# Altium PCB CAN_Logger_V1I1.PcbDoc
Units mm, origin at the board's own origin, x right, y up, seen from the top; angles counter-clockwise.
Board outline 65 x 39 mm, 4 copper layers (Top Layer, GND, PWR, Bottom Layer), stack 1.56 mm thick; 49 components, 33 nets, 180 pads, 62 vias.
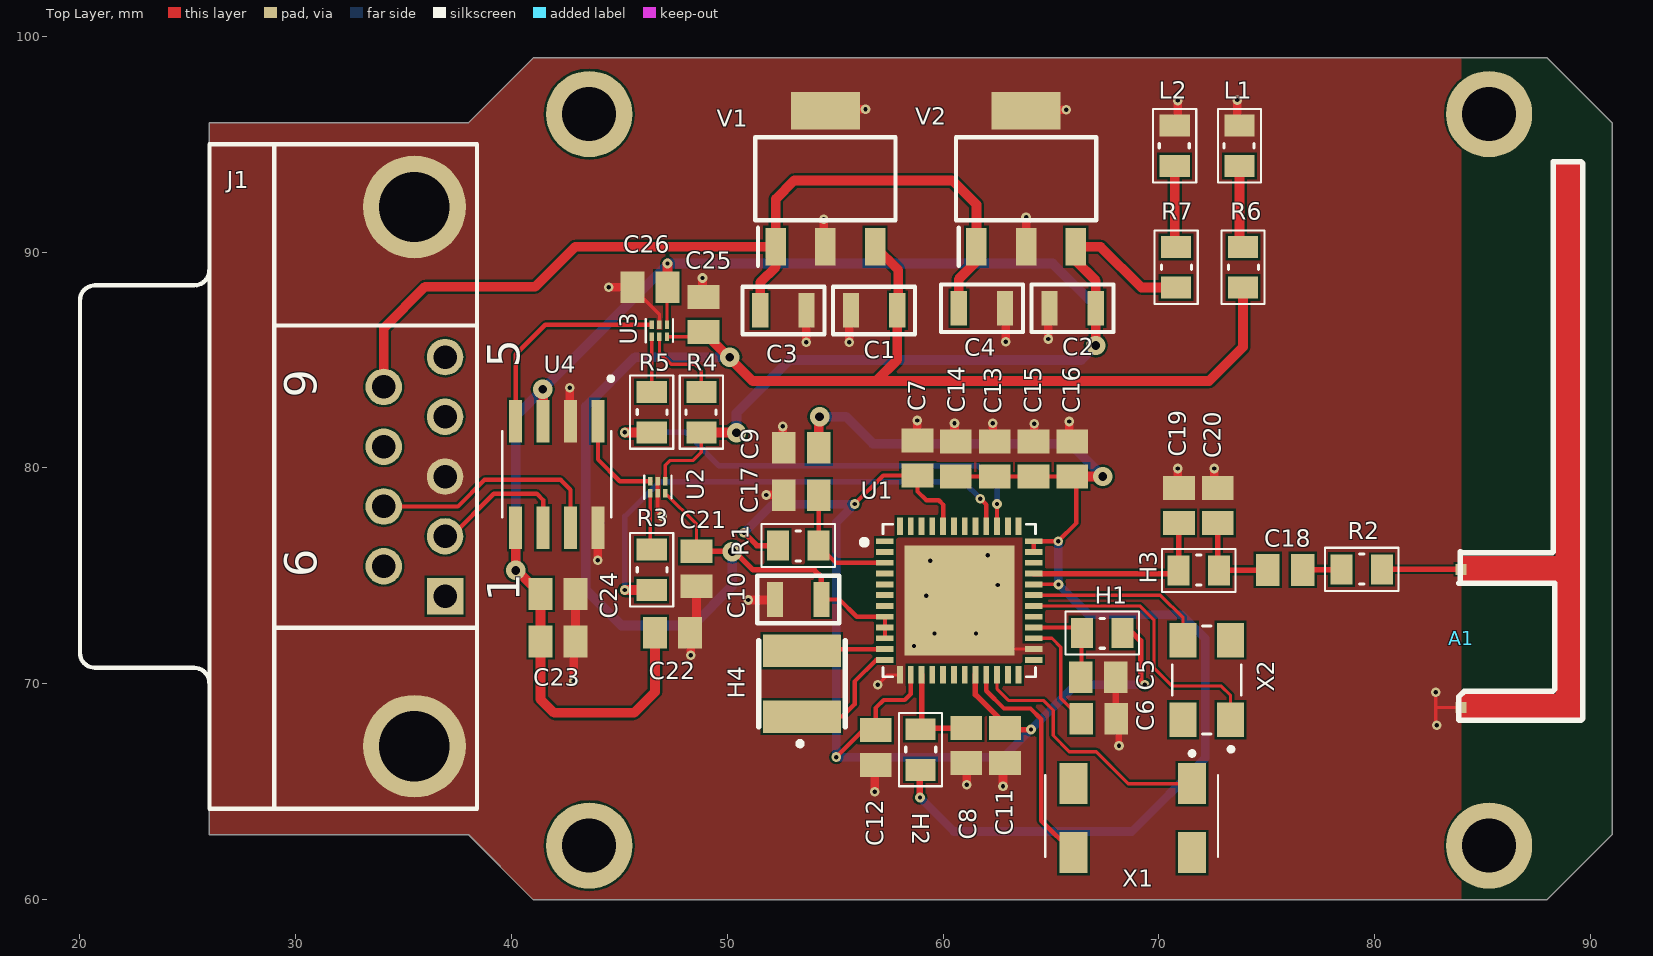
[diagram p0: Top Layer view]
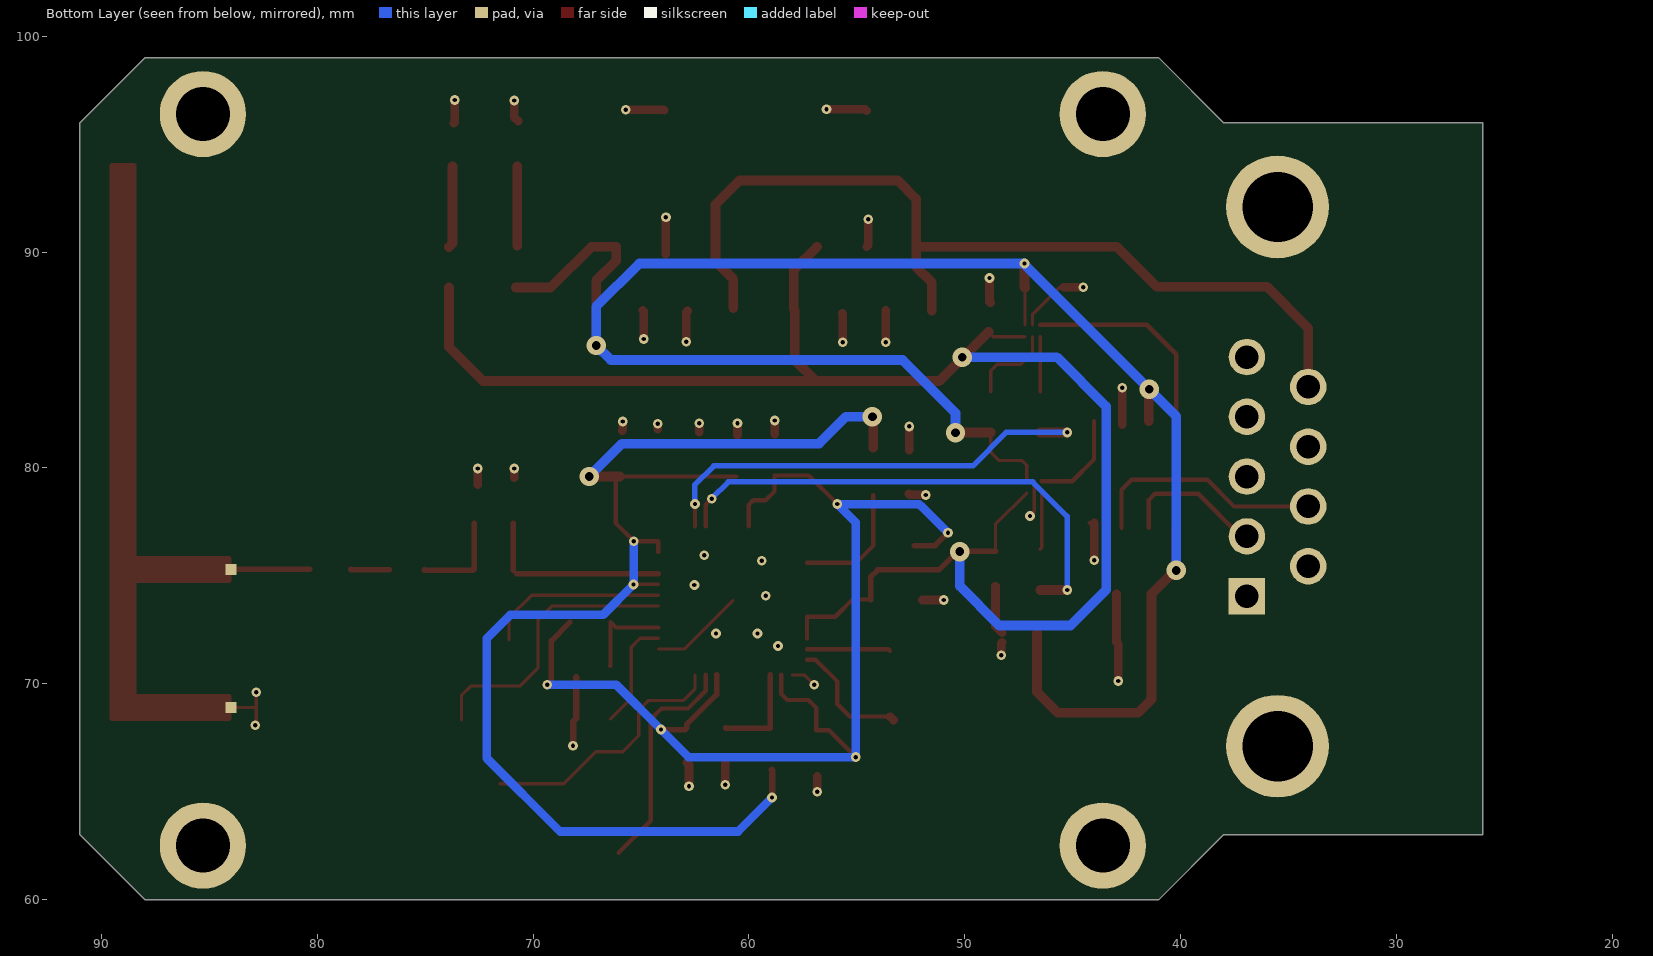
[diagram p1: Bottom Layer view, seen from below]
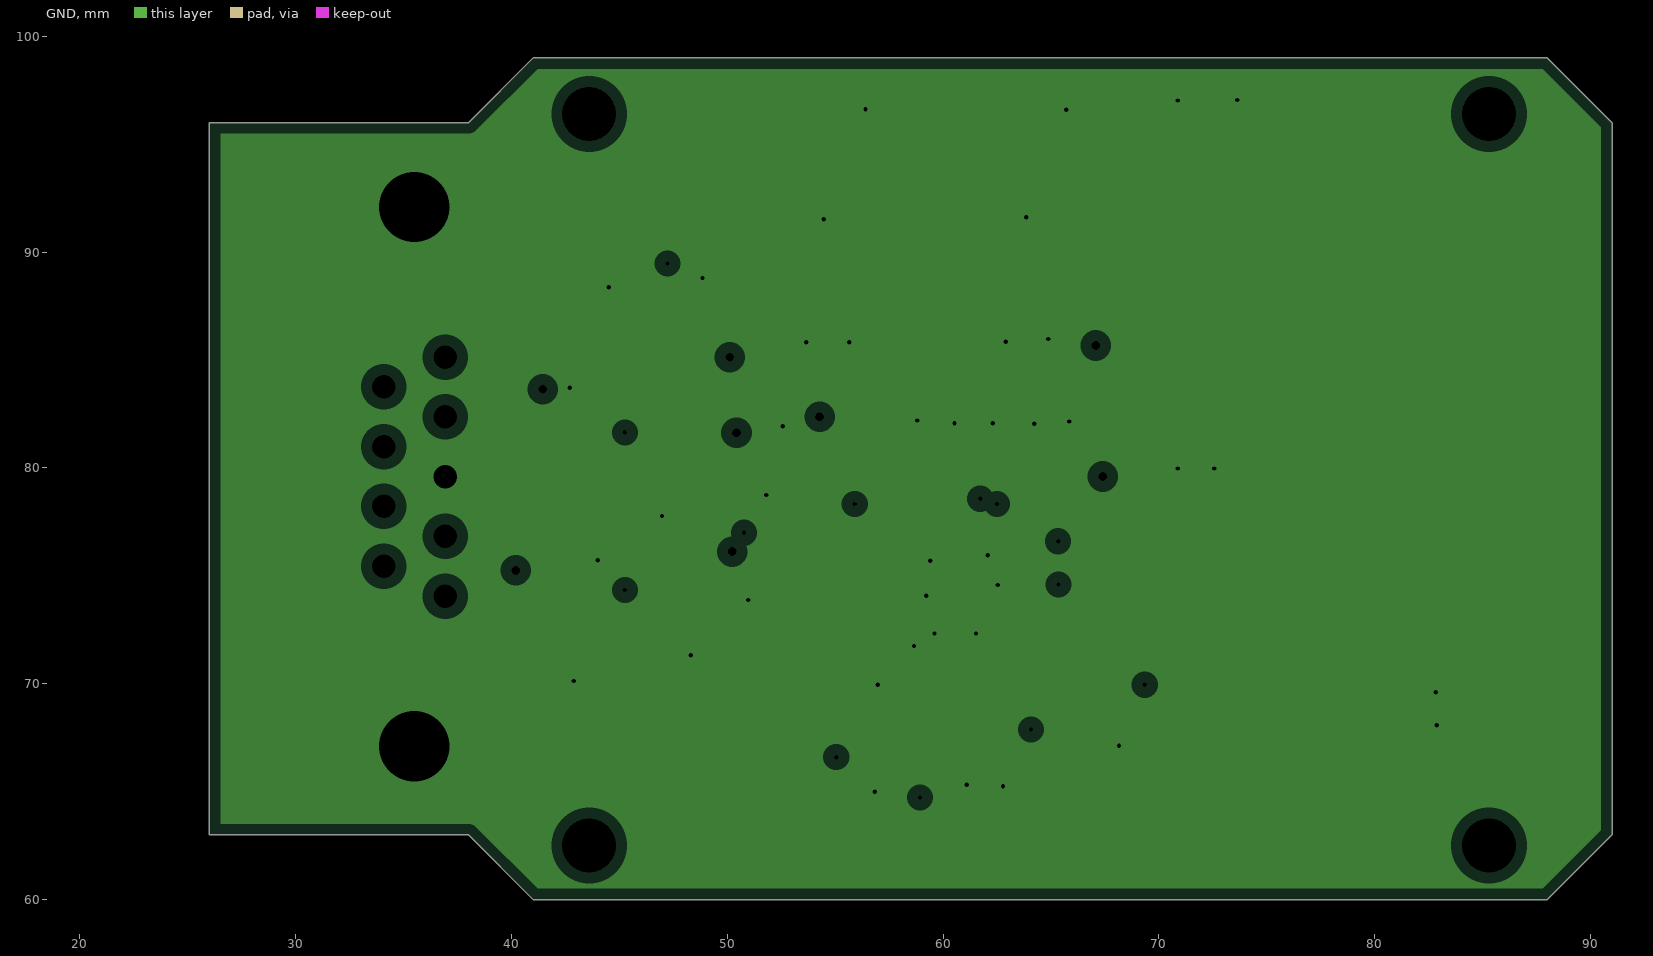
[diagram p2: GND, clearances drawn from the general rule]
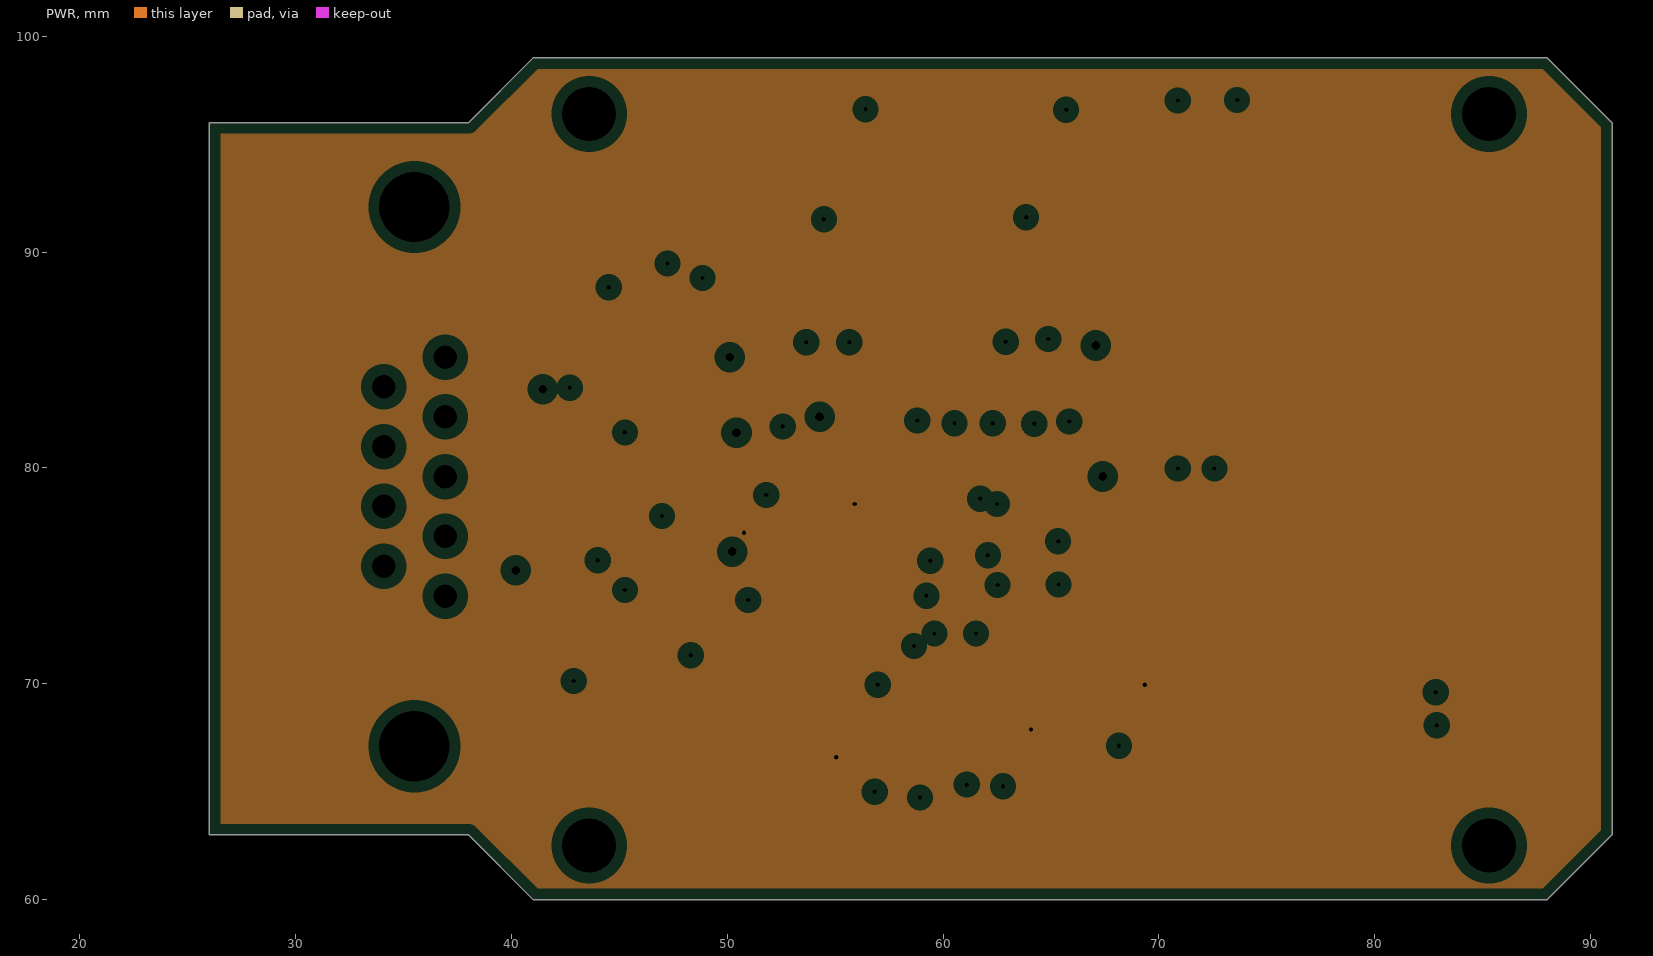
[diagram p3: PWR, clearances drawn from the general rule]

## Layer stack, top to bottom
Top Solder: solder mask 0.02, Solder Resist, Dk 3.5
Top Layer: signal copper 0.043
Dielectric 1: prepreg 0.1123, FR-4, Dk 4.2
GND: plane copper 0.035, net GND
Dielectric 2: core 1.1794, FR-4, Dk 4.2
PWR: plane copper 0.035, net VDD_BRD
Dielectric 3: prepreg 0.1123, FR-4, Dk 4.2
Bottom Layer: signal copper 0.043
Bottom Solder: solder mask 0.02, Solder Resist, Dk 3.5

## Board outline
26,63 26,96 38,96 41,99 88,99 91,96 91,63 88,60 41,60 38,63

## Design rules (kind name [scope] priority, off if disabled: settings)
Clearance [All] p1: gap=0.1
HoleSize [All] p1: absolutevalues=TRUE maxlimit=5 minlimit=0.025 maxpercent=80.000 minpercent=20.000
HoleToHoleClearance [All] p1: gap=0.1 allowstackedmicrovias=TRUE
MinimumSolderMaskSliver [All] p1: minsoldermaskwidth=0.1
PlaneClearance [All] p1: clearance=0.508
PlaneConnect [All] p1: planeconnectstyle=Direct reliefexpansion=0.508 reliefentries=4 reliefconductorwidth=0.254 reliefairgap=0.254
PolygonConnect [All] p1: connectstyle=Direct reliefconductorwidth=0.254 reliefentries=4 polygonreliefangle="90 Angle" airgapwidth=0.254
RoutingVias [All] p1: holewidth=0.2 width=0.45 viastyle="Through Hole" minholewidth=0.2 minwidth=0.45 maxholewidth=0.8 maxwidth=1.6
SilkToSilkClearance [All] p1: silktosilkclearance=0.1
SilkToSolderMaskClearance [IsPad] p1: minsilkscreentomaskgap=0.1 clearancetoexposedcopper=TRUE
SolderMaskExpansion [All] p1: expansion=0.102
Width [All] p1: maxlimit=2 minlimit=0.1 preferedwidth=0.2
23 further rules are at their usual default settings.

## Classes and differential pairs
component class "[03] - Controller": A1 C1 C2 C3 C4 C5 C6 C7 C8 C9 C10 C11 C12 C13 C14 C15 C16 C17 C18 C19 C20 H1 H2 H3 H4 L1 L2 R1 R2 R6 R7 U1 V1 V2 X1 X2
component class "[04] - CAN": C21 C22 C23 C24 C25 C26 J1 R3 R4 R5 U2 U3 U4

## Components (designator, comment, footprint, x,y, rotation, side; value= is the part's Value field where it differs from the comment)
A1 "Antenna" Antenna 90,89.5 r0 top locked
C1 "10uF" C1206 56.8,87.3 r180 top
C2 "10uF" C1206 66,87.4 r180 top
C3 "10uF" C1206 52.6,87.3 r180 top
C4 "10uF" C1206 61.8,87.4 r180 top
C5 "1uF" C0805 67.15,70.375 r0 top
C6 "0.1uF" C0805 67.25,68.3 r180 top
C7 "10uF" C0805 58.887,80.503 r270 top
C8 "10uF" C0805 61,67.1 r90 top
C9 "1uF" C0805 53.387,81.003 r0 top
C10 "10uF" C1206 53.287,73.903 r0 top
C11 "0.1uF" C0805 62.8,67.1 r90 top
C12 "0.1uF" C0805 56.8,67 r90 top
C13 "1uF" C0805 62.46,80.454 r270 top
C14 "0.1uF" C0805 60.66,80.454 r270 top
C15 "20pF" C0805 64.26,80.454 r270 top
C16 "20pF" C0805 66.06,80.454 r270 top
C17 "0.1uF" C0805 53.387,78.803 r0 top
C18 "10pF" C0805 75.9,75.2 r180 top
C19 "0.8pF" C0805 71,78.3 r270 top
C20 "0.8pF" C0805 72.8,78.3 r270 top
C21 "0.1uF" C0805 48.497,75.287 r90 top
C22 "0.1uF" C0805 47.497,72.287 r180 top
C23 "0.1uF" C0805 42.197,71.887 r180 top
C24 "0.1uF" C0805 42.197,74.087 r180 top
C25 "0.1uF" C0805 48.973,87.151 r270 top
C26 "0.1uF" C0805 46.373,88.451 r0 top
H1 "0.1uH" I-0805 67.325,72.3 r180 top
H2 "0.1uH" I-0805 59,66.9 r270 top
H3 "4.7nH" I-0805 71.9,75.3 r0 top
H4 "10uH" SRN4018 53.587,70.003 r90 top
J1 "D Connector 9" DSUB1.385-2H9 26,79.6 r90 top locked
L1 "599-0130-007F" LED0805 73.7,94.9 r90 top
L2 "599-0130-007F" LED0805 70.7,94.9 r90 top
R1 "10K" R0805 53.287,76.403 r180 top
R2 "0" R0805 79.4,75.3 r0 top locked
R3 "0" R0805 46.497,75.287 r270 top
R4 "4.7" R0805 48.797,82.587 r90 top
R5 "0" R0805 46.497,82.587 r270 top
R6 "220" R0805 73.9,89.3 r270 top
R7 "220" R0805 70.8,89.3 r270 top
U1 "MKW35Z512VHT4" MKW35Z512VHT4 56.587,69.703 r0 top
U2 "74LVCH1T45GS" 74LVCH1T45GS,132 46,79.9 r270 top
U3 "74LVCH1T45GS" 74LVCH1T45GS,132 46.073,87.151 r270 top locked
U4 "TJA1057GT/3J" TJA1057GT/3J 39.297,83.487 r270 top locked
V1 "3.3V 500mA" UA78M05/33-CDCYR 54.8,93.4 r90 top
V2 "5V 500mA" UA78M05/33-CDCYR 64.1,93.4 r90 top
X1 "MC-306 32.768KHz" MC-306_32.768KHz 72.8,65.8 r180 top
X2 "32MHz" ECS-250-18-30B-JTN-TR 74.05,67.325 r90 top

## Footprints (in the part's own frame and the unit in brackets; to place one, negate y for a bottom-side part, rotate by r counter-clockwise, add the part's x,y. Pads: shape width x height; smd on the part's side, far side on the other; paste and mask are expansions set on the pad)
74LVCH1T45GS,132 [mm] "74LVCH1T45GS,132"
  rect 0.4x0.2 smd: 1(0.516,1.129) 2(0.516,0.779) 3(0.516,0.429) 4(1.066,0.429) 5(1.066,0.779) 6(1.066,1.129)
  silkscreen extent 0.26,0.15 1.32,1.41, body extent 0.27,0.27 1.33,1.3, height 0.39
Antenna [mm]
  rect 0.5x0.5 all layers, no hole: 1(-6,-20.6) 2(-6,-14.2)
  Top Layer region: -5.9,-21.1 -0.8,-21.1 -0.8,-20.1 -5.9,-20.1
  Top Layer region: -5.9,-14.7 -0.8,-14.7 -0.8,-13.7 -5.9,-13.7
  Top Layer region: -1.5,-21.1 -0.5,-21.1 -0.5,4.5 -1.5,4.5
  Top Layer lines w0.254: -1.5,-13.7 -5.9,-13.7 -5.9,-14.2 -5.9,-14.7 -0.5,-14.7 ; -1.5,-13.7 -1.5,-20.1 -5.9,-20.1 -5.9,-21.1 -0.5,-21.1 -0.5,-14.7 ; -1.5,-13.7 -1.5,4.5 -0.5,4.5 -0.5,-13.7 -0.5,-14.7
C0805 [mm]
  rect 1.1x1.47 smd: 1(-0.769,-0.073) 2(0.851,-0.073)
  body extent -1.02,-0.67 1.12,0.53, height 0.5
C1206 [mm]
  rect 0.75x1.6 smd: 1(-1.075,0) 2(1.075,0)
  silkscreen extent -1.9,-1.1 1.9,1.1, body extent -1.02,-0.75 0.98,0.72, height 0.6
DSUB1.385-2H9 [mm]
  rect 1.69x1.69 hole 1.09: 1(-5.54,-10.92)
  round 1.69 hole 1.09: 2(-2.77,-10.92) 3(0,-10.92) 4(2.77,-10.92) 5(5.54,-10.92) 6(-4.155,-8.08) 7(-1.385,-8.08) 8(1.385,-8.08) 9(4.155,-8.08)
  round 4.76 hole 3.26: 10(-12.495,-9.5) 11(12.495,-9.5)
  silkscreen extent -15.4,-12.4 15.4,6, body extent -15.7,-12.69 15.61,6.11, height 12.55
ECS-250-18-30B-JTN-TR [mm] "Crystal 25mhz 18pf Smd"
  rect 1.6x1.25 smd: 1(0.999,0.73) 2(4.699,0.73) 3(4.699,2.93) 4(0.999,2.93)
  silkscreen extent -0.46,0.23 5.35,3.43, body extent 0.35,0.25 5.35,3.45, height 0.85
I-0805 [mil]
  rect 40x55 smd: 1(-38.97,-1.97) 2(35.03,-1.97)
  silkscreen extent -69,-41 65,37, body extent -48,-26 44,22, height 20
LED0805 [mil]
  rect 40x55 smd: 1(-35.94,-1.3) 2(38.06,-1.3)
  silkscreen extent -66,-41 68,38, body extent -38,-26 41,24, height 39
MC-306_32.768KHz [mm] "Crystals 32.768KHz 12.5pF 20ppm -40C +85C"
  rect 1.3x1.9 smd: 1(1.264,0.432) 2(6.764,0.432) 3(6.764,3.632) 4(1.264,3.632)
  silkscreen extent 0.06,-1.07 8.06,3.83, body extent 1.45,0.43 6.45,3.63, height 0.85
MKW35Z512VHT4 [mm] "RF System on a Chip - SoC Kinetis W 32-bit MCU, ARM Cortex-M0+, 512KB Flash, 64KB SRAM, 48MHz, BLE, 48LQFN"
  rect 0.81x0.27 smd: 1(0.718,6.902) 2(0.718,6.402) 3(0.718,5.902) 4(0.718,5.402) 5(0.718,4.902) 6(0.718,4.402) 7(0.718,3.902) 8(0.718,3.402) 9(0.718,2.902) 10(0.718,2.402) 11(0.718,1.902) 12(0.718,1.402) 25(7.608,1.402) 26(7.608,1.902) 27(7.608,2.402) 28(7.608,2.902) 29(7.608,3.402) 30(7.608,3.902) 31(7.608,4.402) 32(7.608,4.902) 33(7.608,5.402) 34(7.608,5.902) 35(7.608,6.402) 36(7.608,6.902)
  rect 0.27x0.81 smd: 13(1.413,0.707) 14(1.913,0.707) 15(2.413,0.707) 16(2.913,0.707) 17(3.413,0.707) 18(3.913,0.707) 19(4.413,0.707) 20(4.913,0.707) 21(5.413,0.707) 22(5.913,0.707) 23(6.413,0.707) 24(6.913,0.707) 37(6.913,7.597) 38(6.413,7.597) 39(5.913,7.597) 40(5.413,7.597) 41(4.913,7.597) 42(4.413,7.597) 43(3.913,7.597) 44(3.413,7.597) 45(2.913,7.597) 46(2.413,7.597) 47(1.913,7.597) 48(1.413,7.597)
  rect 5.1x5.1 smd: 49(4.163,4.152)
  silkscreen extent -0.29,0.62 7.69,7.68, body extent 0.64,0.63 7.69,7.68, height 0.9
R0805 [mil]
  rect 40x55 smd: 1(-37,0) 2(37,0)
  silkscreen extent -67,-39 67,39, body extent -46,-24 46,24, height 20
SRN4018 [mm] "Fixed Inductors 6.8uH 20% SMD 4018"
  rect 1.5x3.6 smd: 1(-1.525,0.127) 2(1.525,0.127)
  silkscreen extent -2.87,-1.87 2,2.13, body extent -1.6,-1.4 1.7,1.5, height 1.8
TJA1057GT/3J [mm] "CAN Interface IC High-speed CAN transceive"
  rect 1.97x0.6 smd: 1(1.317,4.707) 2(1.317,3.437) 3(1.317,2.167) 4(1.317,0.897) 5(6.257,0.897) 6(6.257,2.167) 7(6.257,3.437) 8(6.257,4.707)
  silkscreen extent -0.75,0.28 5.78,5.41, body extent -0.35,0.05 8.05,5.43, height 2.2
UA78M05/33-CDCYR [mm] "Linear Voltage Regulators 5.0V/3.3V 500mA Fxd Pos"
  rect 1.75x0.95 smd: 1(-3.15,2.554) 2(-3.15,0.254) 3(-3.15,-2.046)
  rect 1.75x3.2 smd: 4(3.15,0.254)
  silkscreen extent -4.03,-3 1.92,3.5, body extent -3.5,-2.94 3.5,3.56, height 1.58

## Part data
C1 C2: library part EIA_A-4.7uF,10V, "Tantalum Capacitors - Polymer SMD 10V 4.7uF 20% 1206 ESR=300mOhm"
C3 C4 C10: library part C_1206-10uF, "Multilayer Ceramic Capacitors MLCC - SMD/SMT 10uF Y5V -20/+80% 50V"
C5 C9 C13: library part C_0805-1uF, "Multilayer Ceramic Capacitors MLCC - SMD/SMT 10V 1uF X7R 0805 10%"
C6 C11 C12 C14 C17 C21 C22 C23 C24 C25 C26: library part C_0805-0.1uF, "Multilayer Ceramic Capacitors MLCC - SMD/SMT 0.1uF 10% 50V AEC-Q200"
C7 C8 C18: library part C_0805-10uF, "Multilayer Ceramic Capacitors MLCC - SMD/SMT 10uF 10% 25V"
C15 C16 C19 C20: library part C_0805-20pF, "Multilayer Ceramic Capacitors MLCC - SMD/SMT 20pF 100volts C0G 5%"
H1 H2: library part I_0805-0.1uH, "Fixed Inductors .1uH 5%"
H3: library part I_0805-4.7nH, "Fixed Inductors 4.7nH"
H4: library part SRN4018-100M, "Fixed Inductors 10uH 20% SMD 4018"
J1: "Receptacle Assembly, 9 Position, Right Angle"
L1 L2: "Standard LEDs - SMD SMD 0805 ORANGE"
R1: library part R_0805-10K, "Thick Film Resistors - SMD 10K   OHM   1% 1/4W"
R2 R3 R5: library part R_0805-0, "Current Sense Resistors - SMD 0 ohm Jumper 1/2W"
R4: library part R_0805-4.7, "Thin Film Resistors - SMD 4.7 ohm 1% 50 ppm High-Precision"
R6 R7: library part R_0805-220, "Thin Film Resistors - SMD"
U1: "RF System on a Chip - SoC Kinetis W 32-bit MCU, ARM Cortex-M0+, 512KB Flash, 64KB SRAM, 48MHz, BLE, 48LQFN"
U2 U3: library part 74LVCH1T45GS,132, "Bus Transceivers 3.6V 250mW 8.2ns"
U4: "CAN Interface IC High-speed CAN transceiver"
V1: library part UA78M33CDCYR, "Linear Voltage Regulators 3.3V 500mA Fixd Pos"
V2: library part UA78M05CDCYR, "Linear Voltage Regulators 5.0V 500mA Fxd Pos"
X1: "Crystals 32.768KHz 12.5pF 20ppm -40C +85C"
X2: library part ECS-25MHz, "Crystals 25MHz 20ppm 18pF -40C +85C"

## Free pads (board coordinates)
  round 4 hole 2.5: 0(43.6,62.5) 0(43.6,96.4) 0(85.3,62.5) 0(85.3,96.4)

## Via types
v1: diameter 0.45, hole 0.2, Top Layer to Bottom Layer, 54 vias
v2: diameter 0.9, hole 0.4, Top Layer to Bottom Layer, 8 vias

## Nets (pads, with @x,y where several pads share a name; then routed paths per layer and width w, separated by ;. In a path a pad name is that pad's centre, name@x,y a point inside that pad or via, vN(x,y) a via of type N, cw(c..) or ccw(c..) an arc to the next point about the centre after c; other vN are vias at no path point)
+3V3_LDO: C1.1 C10.2 C21.2 C25.2 R6.2 U1.8 U1.9 U1.10 U2.6 U3.6 V1.3 | length 79.1
  Top Layer w0.15: U2.6 48.575,77.388 48.575,76.143 C21.2 ; U3.6 48.685,86.085 C25.2
  Top Layer w0.2: C10.2 55.197,73.903 55.995,73.105 U1.8 U1.9 U1.10
  Top Layer w0.254: C21.2 50.337,76.138 51.2,75.275 54.025,75.275 54.362,74.938 C10.2
  Top Layer w0.45: C25.2 51.175,84.025 56.9,84.025 ; V1.3 57.925,89.171 57.925,87.35 C1.1 57.875,85 56.9,84.025 ; R6.2 73.9,85.6 72.325,84.025 56.9,84.025
  Bottom Layer w0.45: v2(50.12,85.132) 45.732,85.132 43.446,82.846 43.446,74.354 45.1,72.7 48.4,72.7 50.225,74.525 v2(50.225,76.125)
+5V_LDO: C2.1 C22.2 C23.2 C24.2 C26.2 R4.1 R7.2 U2.1 U3.1 U4.3 U4.5 V2.3 | length 95.5
  Top Layer w0.15: U2.1 47.129,80.129 47.35,80.35 48.425,80.35 48.797,80.722 R4.1 ; U3.1 C26.2@47.202,88.356 ; v2@50.078,81.647 50.403,81.647 v2(50.425,81.625)
  Top Layer w0.45: U4.5 40.194,75.312 C24.2 C23.2 41.346,69.279 41.975,68.65 45.675,68.65 46.646,69.621 C22.2 ; v2(41.45,83.65) 41.464,83.636 U4.3 ; C26.2@47.202,88.356 C26.2 47.225,88.379 v1(47.225,89.475) ; R4.1 v2@50.078,81.647 ; v2(67.075,85.675) C2.1 67.075,88.675 66.146,89.604 V2.3 67.3,90.25 69.19,88.36 R7.2
  Bottom Layer w0.45: v2(40.2,75.25) 40.2,82.4 v2(41.45,83.65) v1@47.225,89.425 ; v1(47.225,89.475) 65.075,89.475 67.075,87.475 v2(67.075,85.675) 66.4,85 52.875,85 50.425,82.55 v2(50.425,81.625)
+12V_VIN: C3.2 C4.2 J1.9 V1.1 V2.1 | length 43.2
  Top Layer w0.45: J1.9 34.08,86.48 36,88.4 41.1,88.4 42.95,90.25 V1.1 ; C3.2 51.525,88.6 52.246,89.321 V1.1 ; C4.2 60.725,88.75 61.546,89.571 V2.1 61.546,92.204 60.425,93.325 53.1,93.325 52.246,92.471 V1.1
CAN_H: J1.7 U4.7 | length 11.1
  Top Layer w0.2: J1.7 37.515,78.215 38.75,79.45 42.275,79.45 42.734,78.991 U4.7
CAN_L: J1.2 U4.6 | length 6.8
  Top Layer w0.2: J1.2 37.205,76.83 39.175,78.8 41.175,78.8 41.464,78.511 U4.6
GND: A1.1 C1.2 C2.2 C3.1 C4.1 C5.2 C6.1 C7.1 C8.1 C9.1 C10.1 C11.1 C12.1 C13.1 C14.1 C15.1 C16.1 C17.1 C19.1 C20.1 C21.1 C22.1 C23.1 C24.1 C25.1 C26.1 J1.3 J1.10 J1.11 L1.2 L2.2 U1.13 U1.26 U1.49 U2.2 U2.5 U3.2 U4.2 U4.8 V1.2 V1.4 V2.2 V2.4 | length 51.8
  Top Layer w0.15: U4.8 U4.8@44.229,77.455 ; C26.1 46.852,87.13 U3.2 ; U2.2 U2.5 46.779,77.971 v1(46.975,77.775) ; v1(56.975,69.95) 57.435,70.41 U1.13 ; U1.49 63,71.605 U1.26 ; v1(82.825,69.6) 82.825,68.9 ; v1(82.875,68.075) 82.825,68.125 82.825,68.9 ; A1.1@83.798,68.9 82.825,68.9
  Top Layer w0.3: C5.2 68.001,68.391 C6.1 68.15,68.242 v1(68.15,67.125)
  Top Layer w0.4: U4.2@42.696,82 v1(42.696,83.721) ; v1(42.879,70.129) 42.879,71.85 42.966,71.937 C23.1 C24.1 ; v1(43.996,75.725) U4.8@43.996,77.446 ; v1(44.5,88.371) C26.1@45.4,88.371 ; C22.1@48.254,71.925 48.3,71.879 v1(48.3,71.325) ; C22.1 48.57,72.664 C21.1 ; C25.1@48.804,87.654 48.85,87.7 v1(48.85,88.8) ; v1(50.975,73.879) C10.1@51.971,73.879 ; v1(51.8,78.75) 52.554,78.75 C17.1@52.6,78.796 ; C9.1@52.571,80.825 v1(52.571,81.925) ; v1(53.654,85.825) C3.1@53.654,87.3 ; v1(54.475,91.525) 54.475,90.321 V1.2 ; V1.4 54.621,96.625 v1(56.4,96.625) ; v1(55.65,85.825) 55.65,87.146 C1.2@55.679,87.175 ; v1(56.829,65) C12.1@56.829,65.7 ; C7.1@58.796,81.575 58.8,81.579 v1(58.8,82.2) ; C14.1@60.521,81.525 60.525,81.529 v1(60.525,82.075) ; C8.1 61.1,66.304 v1(61.1,65.325) ; C13.1@62.296,81.65 v1(62.296,82.075) ; v1(62.775,65.25) 62.775,66.233 C11.1 ; C4.1@62.846,87.271 62.9,87.217 v1(62.9,85.85) ; V2.2@63.846,89.9 v1(63.846,91.621) ; V2.4@63.921,96.575 63.946,96.6 v1(65.7,96.6) ; 64.221,81.8 64.225,81.804 v1(64.225,82.05) ; v1(64.875,85.975) 64.875,87.25 C2.2@64.921,87.296 ; v1(65.85,82.15) 65.85,81.746 C16.1@65.871,81.725 ; L2.2@70.696,96.075 70.875,96.254 v1(70.875,97.025) ; C19.1@70.871,79.55 70.875,79.554 v1(70.875,79.975) ; C20.1@72.571,79.225 v1(72.571,79.975) ; v1(73.625,97.05) 73.625,96.021 L1.2@73.671,95.975
  other v1: 58.65,71.75 59.6,72.325 61.525,72.325 59.225,74.075 62.525,74.575 59.4,75.7 62.075,75.95
NetA1_2: A1.2 R2.2 | length 3.8
  Top Layer w0.254: R2.2 A1.2@84.1,75.3
NetC5_1: C5.1 H1.2 U1.28 | length 4.3
  Top Layer w0.2: U1.28 66.165,72.605 66.41,72.85 66.41,70.838 C5.1@66.418,70.83
NetC8_2: C8.2 H2.1 U1.15 | length 4.5
  Top Layer w0.254: U1.15 59,67.94 61.062,67.94 C8.2
NetC18_1: C18.1 R2.1 | length 1.8
  Top Layer w0.254: C18.1 78.433,75.273 R2.1
NetC18_2: C18.2 C20.2 H3.2 | length 4.5
  Top Layer w0.254: C20.2 72.727,75.313 H3.2 75.026,75.25 C18.2
NetC19_2: C19.2 H3.1 U1.33 | length 8.8
  Top Layer w0.254: U1.33 H3.1@70.765,75.105 ; H3.1 70.927,75.267 C19.2
NetH4_1: H4.1 U1.12 | length 5.8
  Top Layer w0.2: H4.1 55.328,68.478 55.9,69.05 55.9,70.1 56.905,71.105 U1.12
  Top Layer w0.4: H4.1@53.3,68.318 H4.1
NetH4_2: H4.2 U1.11 | length 3.9
  Top Layer w0.2: H4.2 53.537,71.605 U1.11
NetL1_1: L1.1 R6.1 | length 3.8
  Top Layer w0.45: L1.1 73.733,90.407 R6.1
NetL2_1: L2.1 R7.1 | length 3.8
  Top Layer w0.2: R7.1@70.733,90.307 R7.1
  Top Layer w0.45: R7.1@70.733,90.307 L2.1
NetR3_1: R3.1 U2.4 | length 2.6
  Top Layer w0.15: U2.4 46.429,76.295 R3.1
NetR4_2: R4.2 U3.5 | length 4
  Top Layer w0.15: U3.5 46.852,85.348 47.4,84.8 48.5,84.8 48.797,84.503 R4.2
NetR5_1: R5.1 U3.4 | length 2.6
  Top Layer w0.15: R5.1 46.502,83.532 U3.4
NetU1_21: U1.21 X1.3 | length 10.6
  Top Layer w0.2: U1.21 62,69.675 62.825,68.85 64.05,68.85 64.55,68.35 64.55,63.654 X1.3
NetU1_22: U1.22 X1.1 | length 12.2
  Top Layer w0.15: U1.22 62.5,69.75 63.025,69.225 64.65,69.225 65.1,68.775 65.1,67.6 65.85,66.85 67.1,66.85 68.582,65.368 X1.1
NetU1_30: U1.30 X2.1 | length 13.3
  Top Layer w0.15: U1.30 69.12,73.605 69.775,72.95 69.775,70.725 70.6,69.9 72.875,69.9 73.32,69.455 X2.1
NetU1_31: U1.31 X2.3 | length 8.4
  Top Layer w0.15: U1.31 70.07,74.105 71.12,73.055 X2.3
NetU2_3: U2.3 U4.1 | length 4.6
  Top Layer w0.2: U4.1 44.004,80.396 45.016,79.384 U2.3
NetU3_3: U3.3 U4.4 | length 10
  Top Layer w0.2: U4.4 40.194,85.269 41.56,86.635 U3.3
PTA0/SWD_DIO: U1.1
PTA1/SWD_CLK: U1.2
PTC3: R5.2 U1.39 | length 21.4
  Top Layer w0.2: U1.39 v1(62.5,78.325)
  Top Layer w0.45: v1(45.253,81.647) R5.2
  Bottom Layer w0.254: v1(45.253,81.647) 48.078,81.647 49.625,80.1 61.625,80.1 62.5,79.225 v1(62.5,78.325)
PTC4: R3.2 U1.40 | length 23.5
  Top Layer w0.2: v1(61.725,78.575) 62,78.3 U1.40
  Top Layer w0.45: v1(45.253,74.347) R3.2
  Bottom Layer w0.254: v1(45.253,74.347) 45.253,77.753 46.85,79.35 60.95,79.35 v1(61.725,78.575)
RST_TGTMCU_B: C17.2 R1.1 U1.3 | length 5.7
  Top Layer w0.2: C17.2 54.238,76.414 R1.1 55.03,75.6 57.3,75.6 U1.3
VDD_BRD: C7.2 C11.2 C12.2 H1.1 R1.2 U1.14 U1.20 U1.44 | length 55.6
  Top Layer w0.2: v1(55.05,66.6) 56.301,67.851 C12.2 56.873,68.873 57.25,69.25 58.225,69.25 58.5,69.525 U1.14 ; v1(55.9,78.325) 57.227,79.652 C7.2 58.814,78.911 59.225,78.5 59.8,78.5 60,78.3 U1.44
  Top Layer w0.254: v1(50.775,77) 51.372,76.403 R1.2 ; U1.20 61.5,69.5 62.873,68.127 C11.2 62.949,67.875 v1(64.075,67.875) ; H1.1@68.29,72.85 69.15,71.99 69.15,70.15 v1(69.35,69.95)
  Bottom Layer w0.4: v1(50.775,77) 52,78.225 52.017,78.225 52.117,78.325 v1(55.9,78.325) 55.05,77.475 v1(55.05,66.6) 62.8,66.6 v1(64.075,67.875) 66.15,69.95 v1(69.35,69.95)
VDD_REF: C9.2 C13.2 C14.2 C15.2 C16.2 H2.2 U1.32 U1.35 U1.36 | length 60.7
  Top Layer w0.15: U1.32 65.345,74.605 v1(65.35,74.6)
  Top Layer w0.2: C14.2 C13.2 C15.2 C16.2 66.175,79.415 66.175,77.45 v1(65.33,76.605) U1.36 U1.35
  Top Layer w0.3: v1(58.925,64.725) 58.925,65.985 H2.2
  Top Layer w0.45: C9.2 54.238,82.288 v2@54.25,82.3 ; C16.2 v2(67.403,79.603)
  Bottom Layer w0.4: v1(58.925,64.725) 60.5,63.15 68.75,63.15 72.15,66.55 72.15,72.1 71.05,73.2 66.75,73.2 v1(65.35,74.6) 65.33,74.62 v1(65.33,76.605)
  Bottom Layer w0.45: v2(54.275,82.375) 55.5,82.375 56.75,81.125 65.881,81.125 v2(67.403,79.603)
VREF_OUT: C6.2 U1.27 | length 5.1
  Top Layer w0.15: U1.27 65.045,72.105 65.45,71.7 65.45,69.322 C6.2
pads on no net: J1.1 J1.4 J1.5 J1.6 J1.8 U1.4 U1.5 U1.6 U1.7 U1.16 U1.17 U1.18 U1.19 U1.23 U1.24 U1.25 U1.29 U1.34 U1.37 U1.38 U1.41 U1.42 U1.43 U1.45 U1.46 U1.47 U1.48 X1.2 X1.4 X2.2 X2.4

## Polygon pours and split planes (outlines as drawn)
GND on Top Layer "Top Overlay-No Net" (solid, remove dead copper, pour order 2): 26,96 38,96 41,99 84,99 84,96 84,60 41,60 38,63 26,63
GND on GND (split plane): 90.49,95.789 90.49,63.211 87.789,60.51 41.211,60.51 38.361,63.361 38.284,63.424 38.195,63.472 38.1,63.501 38,63.51 26.51,63.51 26.51,95.49 38,95.49 38.1,95.499 38.195,95.528 38.284,95.576 38.361,95.639 41.211,98.49 87.789,98.49
VDD_BRD on PWR (split plane): 90.49,95.789 90.49,63.211 87.789,60.51 41.211,60.51 38.361,63.361 38.284,63.424 38.195,63.472 38.1,63.501 38,63.51 26.51,63.51 26.51,95.49 38,95.49 38.1,95.499 38.195,95.528 38.284,95.576 38.361,95.639 41.211,98.49 87.789,98.49

## Silkscreen, mask and mechanical layers (free items; w line width, h text height)
Top Overlay:
  lines w0.254: 83.9,68.325 83.9,69.4 84.15,69.65 88.25,69.65 88.35,69.75 88.35,74.65 83.9,74.65 83.975,74.725 83.975,76.125 84.025,76.075 88.225,76.075 88.275,76.125 88.275,94.2 89.55,94.2 89.65,94.1 89.65,68.4 89.55,68.3 83.925,68.3 83.9,68.325
Top Solder:
  rectangle: 84,59.975 91.075,99.05
Dimention:
  lines w0.254: 19.492,64.524 20,63 ; 19.492,94.476 20,96 ; 19.746,63 20.254,63 ; 19.746,96 20.254,96 ; 20,74.396 20,63 ; 20,84.604 20,96 ; 20.508,64.524 20,63 ; 20.508,94.476 20,96 ; 26,63 20,63 ; 26,99.746 26,100.254 ; 26,106.95 26,96 20,96 ; 26.001,106.571 26.001,107.079 ; 26.027,103.746 26.027,104.254 ; 27.524,99.492 26,100 ; 27.524,100.508 26,100 ; 27.525,106.317 26.001,106.825 ; 27.525,107.333 26.001,106.825 ; 27.551,103.492 26.027,104 ; 27.551,104.508 26.027,104 ; 28.927,100 26,100 ; 30.455,104 26.027,104 ; 35.073,100 38,100 ; 36.476,99.492 38,100 ; 36.476,100.508 38,100 ; 36.6,104 41.027,104 ; 38,96 38,100 ; 38,99.746 38,100.254 ; 39.503,103.492 41.027,104 ; 39.503,104.508 41.027,104 ; 41,99 41,104.975 ; 41,103.696 41,104.204 ; 41.027,103.746 41.027,104.254 ; 42.524,103.442 41,103.95 ; 42.524,104.458 41,103.95 ; 43.725,96.525 43.725,101.9 ; 43.775,101.579 43.775,101.071 ; 45.298,101.835 43.775,101.325 ; 45.3,100.819 43.775,101.325 ; 55.301,106.825 26.001,106.825 ; 57.415,101.341 43.775,101.325 ; 61.7,106.825 91.001,106.825 ; 62.801,103.95 41,103.95 ; 69.2,103.95 91.001,103.95 ; 71.685,101.359 85.325,101.375 ; 83.8,101.881 85.325,101.375 ; 83.802,100.865 85.325,101.375 ; 85.325,62.45 94.825,62.45 ; 85.325,101.121 85.325,101.629 ; 85.325,102.175 85.325,96.45 94.975,96.45 ; 88,60 100,60 ; 88,99 100,99 ; 89.477,103.442 91.001,103.95 ; 89.477,104.458 91.001,103.95 ; 89.477,106.317 91.001,106.825 ; 89.477,107.333 91.001,106.825 ; 91,96 91,107.325 ; 91.001,103.696 91.001,104.204 ; 91.001,106.571 91.001,107.079 ; 94.324,63.976 94.825,62.45 ; 94.46,94.928 94.975,96.45 ; 94.571,62.451 95.079,62.449 ; 94.721,96.451 95.229,96.449 ; 94.877,74.346 94.825,62.45 ; 94.923,84.554 94.975,96.45 ; 95.34,63.972 94.825,62.45 ; 95.476,94.924 94.975,96.45 ; 99.492,61.524 100,60 ; 99.492,97.476 100,99 ; 99.746,60 100.254,60 ; 99.746,99 100.254,99 ; 100,76.301 100,60 ; 100,82.699 100,99 ; 100.508,61.524 100,60 ; 100.508,97.476 100,99
  text "65mm" at 55.555,105.911 h1.52
  text "15mm" at 30.709,103.086 h1.52
  text "50mm" at 63.055,103.036 h1.52
  text "41.55 (mm)" at 57.67,100.428 h1.52 r0.07
  text "12mm" at 29.181,99.086 h1.52
  text "39mm" at 100.914,76.555 h1.52 r90
  text "33 (mm)" at 20.914,74.65 h1.52 r90
  text "34 (mm)" at 95.793,74.596 h1.52 r89.75
Border:
  lines w0.254: 41,60 38,63 26,63 26,96 38,96 41,99 88,99 91,96 91,63 88,60 43,60
Mechanical 16:
  lines w0.254: 41,60 43,60

## Text inside footprints (layer, text, board x,y; h text height)
J1: Top Overlay "1" at 40.375,73.81 h1.5 r90; Top Overlay "5" at 40.375,84.64 h1.5 r90; Top Overlay "9" at 30.975,83.255 h1.5 r90; Top Overlay "6" at 30.975,74.945 h1.5 r90